# EAGLE board Charger Board (EAGLE 6.2)
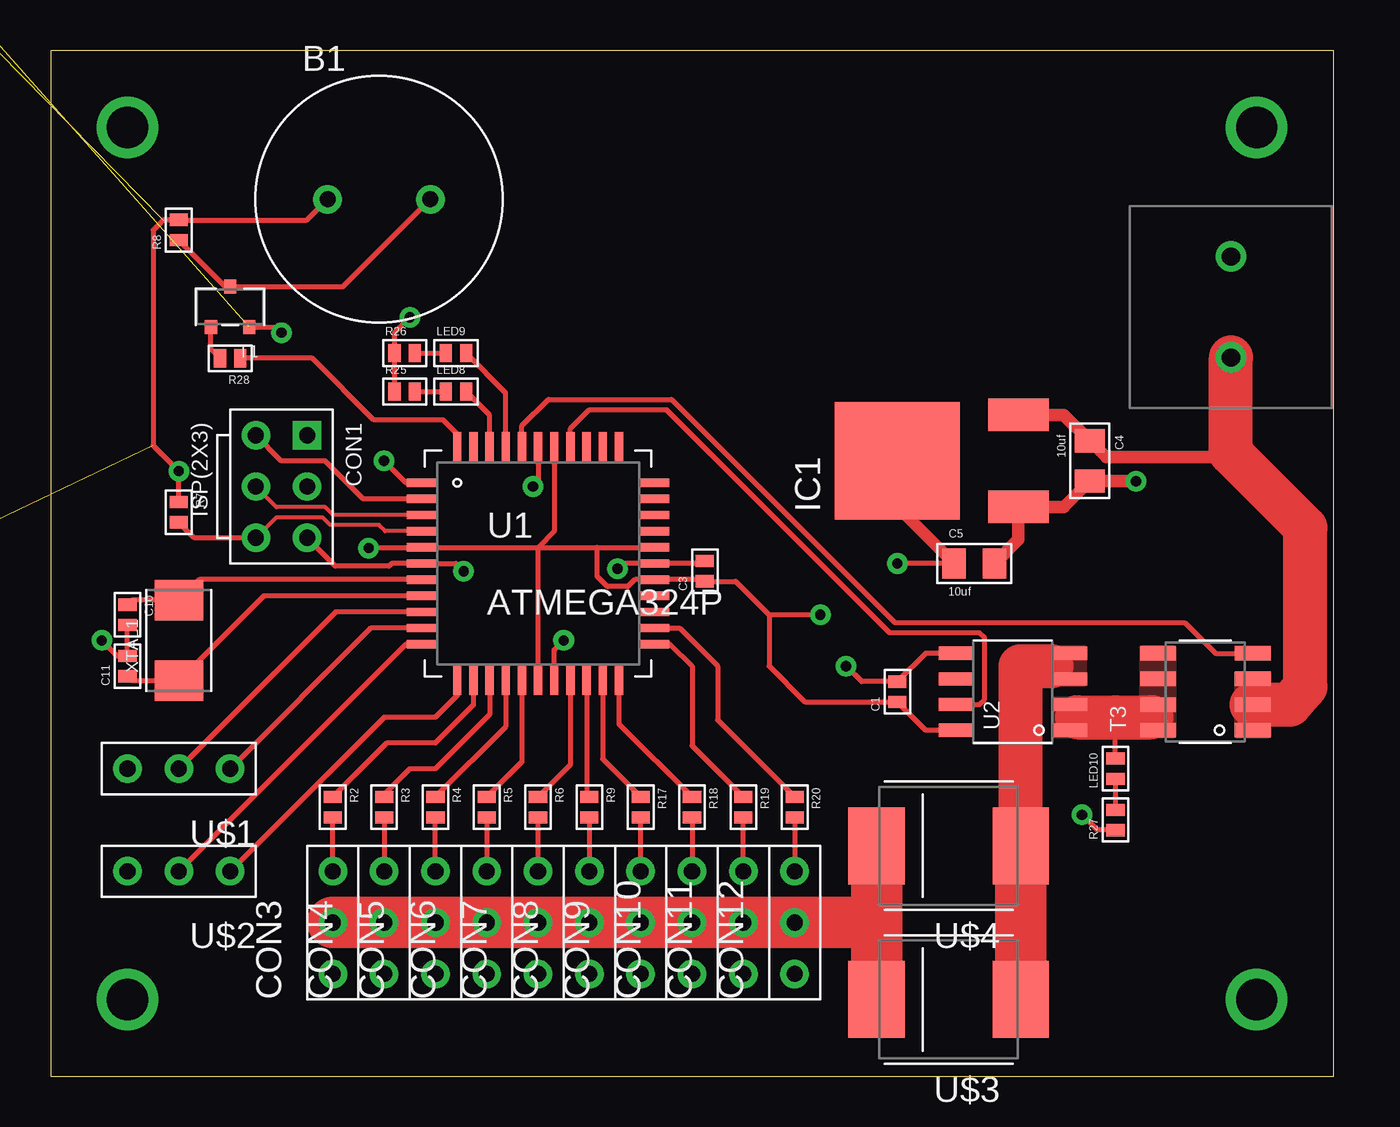
[diagram p0: board, top side]
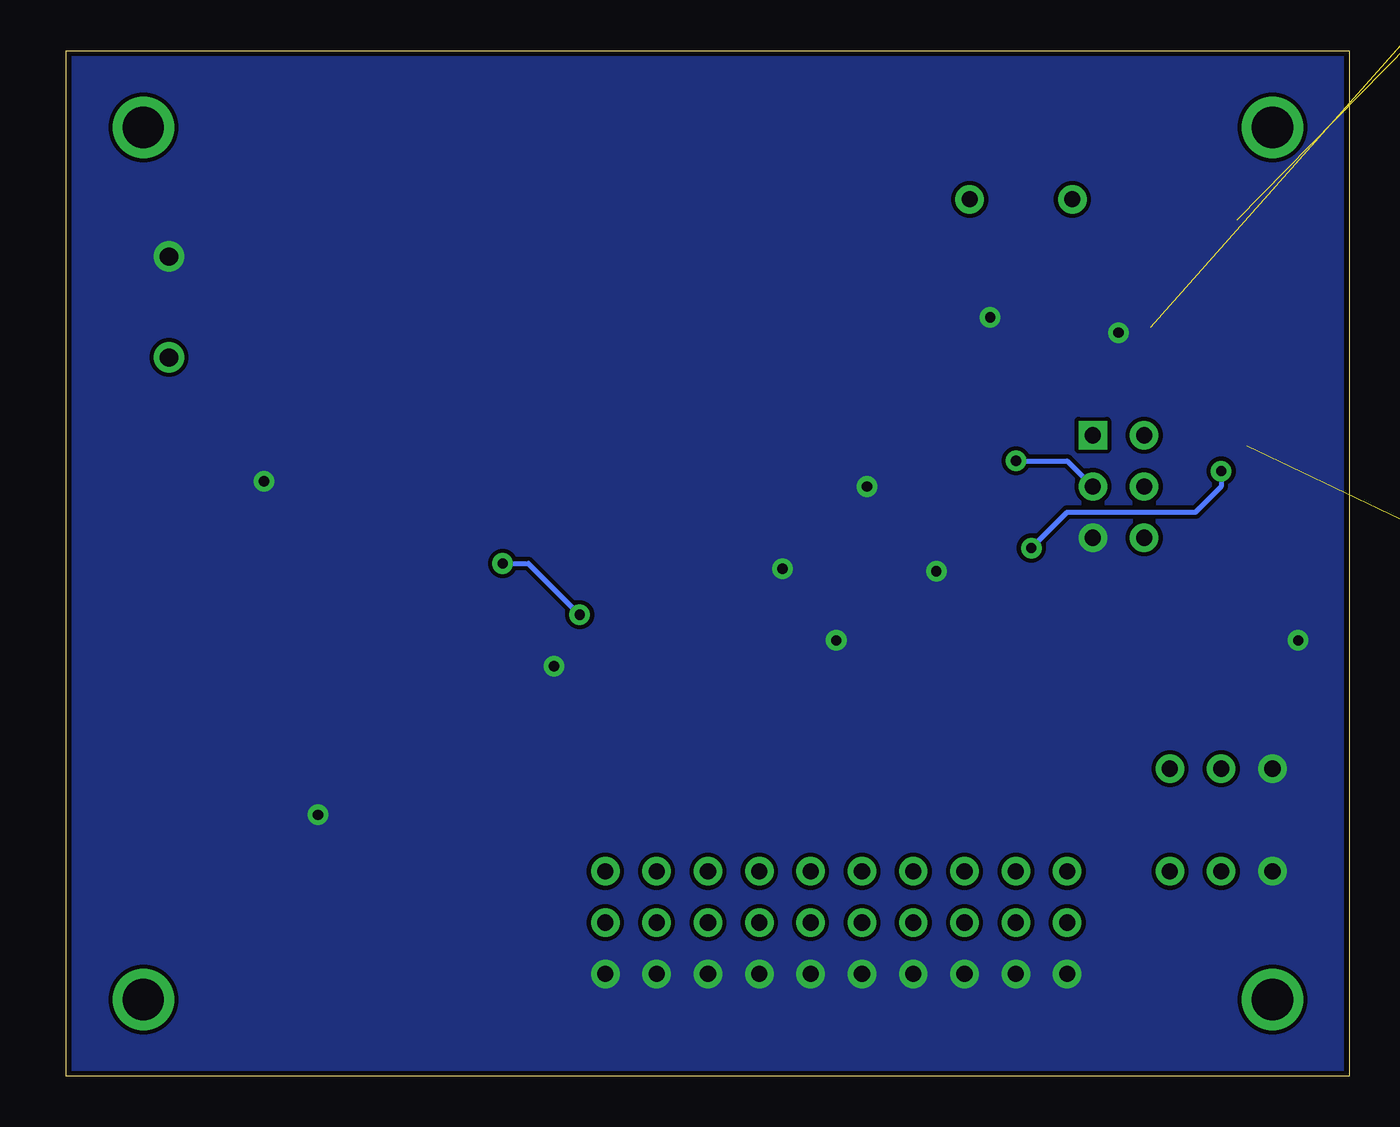
[diagram p1: board, bottom side, seen from below]

Size 63.5 x 50.8 mm. Coordinates in mm from the lower left corner, seen from the top.
Outline: 0,0 63.5,0 63.5,50.8 0,50.8 0,0
Copper layers (1*16): Top 0.035mm / dielectric 1.5mm / Bottom 0.035mm
Design rules: minimum track width 8mil, minimum drill 20mil, track to track 8mil, track to pad 8mil, pad to pad 8mil, via to via 8mil, smd to smd 8mil, copper to edge 10mil, drill to drill 8mil, minimum pad ring 12mil, minimum via ring 10mil, stop-mask expansion 4mil, vias tented up to drill 25mil, thermal gap 10mil

## Footprints (pad centres in the part's own frame; a part is rotated, then mirrored left to right if it is on the bottom)
PIEZOBUZZER = drill 0.8: 1 -2.54,0; 2 2.54,0
0603 = smd 0.6 x 0.9: 1 -0.5,0; 2 0.5,0
0805 = smd 1.15 x 1.5: 1 -1,0; 2 1,0
PINHEADER(2X3) = drill 0.8 square: 1 -2.54,1.27 | drill 0.8: 2 0,1.27; 3 2.54,1.27; 4 2.54,-1.27; 5 0,-1.27; 6 -2.54,-1.27
SCREWTERMINAL_1X2 = drill 0.9: 1 -2.5,0; 2 2.5,0
3PINHEADER_.100" = drill 0.8: 1 -2.54,0; 2 0,0; 3 2.54,0
MOUNTINGHOLE = drill 2.032 pad 2.286: P$2 0,0
DPAK = smd 1.6 x 3: 1 -2.28,-5.99; 3 2.28,-5.99 | smd 5.8 x 6.2: 2 0,0
5MM_LED_RA = drill 0.8 square: 1 -1.27,0 | drill 0.8: 2 1.27,0
SOT23 = smd 0.6 x 0.7: 1 0.95,1; 2 -0.95,1; 3 0,-1
S0-8 = smd 0.72 x 1.78: 1 -1.905,-2.34; 2 -0.635,-2.34; 3 0.635,-2.34; 4 1.905,-2.34; 5 1.905,2.34; 6 0.635,2.34; 7 -0.635,2.34; 8 -1.905,2.34
TQFP44 = smd 1.5 x 0.406: 1 -5.75,4; 2 -5.75,3.2; 3 -5.75,2.4; 4 -5.75,1.6; 5 -5.75,0.8; 6 -5.75,0; 7 -5.75,-0.8; 8 -5.75,-1.6; 9 -5.75,-2.4; 10 -5.75,-3.2; 11 -5.75,-4; 23 5.75,-4; 24 5.75,-3.2; 25 5.75,-2.4; 26 5.75,-1.6; 27 5.75,-0.8; 28 5.75,0; 29 5.75,0.8; 30 5.75,1.6; 31 5.75,2.4; 32 5.75,3.2; 33 5.75,4 | smd 0.406 x 1.5: 12 -4,-5.75; 13 -3.2,-5.75; 14 -2.4,-5.75; 15 -1.6,-5.75; 16 -0.8,-5.75; 17 0,-5.75; 18 0.8,-5.75; 19 1.6,-5.75; 20 2.4,-5.75; 21 3.2,-5.75; 22 4,-5.75; 34 4,5.75; 35 3.2,5.75; 36 2.4,5.75; 37 1.6,5.75; 38 0.8,5.75; 39 0,5.75; 40 -0.8,5.75; 41 -1.6,5.75; 42 -2.4,5.75; 43 -3.2,5.75; 44 -4,5.75
8SOIC = smd 0.65 x 1.75: 1 -1.905,-2.8; 2 -0.635,-2.8; 3 0.635,-2.8; 4 1.905,-2.8; 5 1.905,2.8; 6 0.635,2.8; 7 -0.635,2.8; 8 -1.905,2.8
SMD_DIODE = smd 2.794 x 3.81: 1 -3.568,0; 2 3.568,0
SMDXTAL = smd 2 x 2.4: 1 -2,0; 2 2,0

## Placement (x,y rotation side)
B1  PIEZOBUZZER  [PIEZOBUZZER]  16.26,43.43 0 top
C1  .1uf  [0603]  41.91,19.05 90 top
C3  1uf  [0603]  32.38,25.02 90 top
C4  10uf  [0805]  51.44,30.48 270 top
C5  10uf  [0805]  45.72,25.4 0 top
C6  10uf  [0805]  -19.05,68.58 0 top  (outside the outline)
C10  12pf  [0603]  3.81,22.86 270 top
C11  12pf  [0603]  3.81,20.32 90 top
CON1  ISP(2X3)  [PINHEADER(2X3)]  11.43,29.21 270 top
CON2  SCREWTERMINAL_1X2  [SCREWTERMINAL_1X2]  58.42,38.1 90 top
CON3  HEADER_3X1  [3PINHEADER_.100"]  13.97,7.62 90 top
CON4  HEADER_3X1  [3PINHEADER_.100"]  16.51,7.62 90 top
CON5  HEADER_3X1  [3PINHEADER_.100"]  19.05,7.62 90 top
CON6  HEADER_3X1  [3PINHEADER_.100"]  21.59,7.62 90 top
CON7  HEADER_3X1  [3PINHEADER_.100"]  24.13,7.62 90 top
CON8  HEADER_3X1  [3PINHEADER_.100"]  26.67,7.62 90 top
CON9  HEADER_3X1  [3PINHEADER_.100"]  29.21,7.62 90 top
CON10  HEADER_3X1  [3PINHEADER_.100"]  31.75,7.62 90 top
CON11  HEADER_3X1  [3PINHEADER_.100"]  34.29,7.62 90 top
CON12  HEADER_3X1  [3PINHEADER_.100"]  36.83,7.62 90 top
H1  MOUNTINGHOLE  [MOUNTINGHOLE]  3.81,3.81 0 top
H2  MOUNTINGHOLE  [MOUNTINGHOLE]  3.81,46.99 0 top
H3  MOUNTINGHOLE  [MOUNTINGHOLE]  59.69,46.99 0 top
H4  MOUNTINGHOLE  [MOUNTINGHOLE]  59.69,3.81 0 top
IC1  NCP1117DT33G  [DPAK]  41.91,30.48 90 top
LED2  IR  [5MM_LED_RA]  -62.23,2.54 0 top  (outside the outline)
LED3  IR  [5MM_LED_RA]  -68.58,2.54 0 top  (outside the outline)
LED4  IR  [5MM_LED_RA]  -16.51,20.32 0 top  (outside the outline)
LED5  IR  [5MM_LED_RA]  -22.86,20.32 0 top  (outside the outline)
LED6  IR  [5MM_LED_RA]  -29.21,20.32 0 top  (outside the outline)
LED7  IR  [5MM_LED_RA]  -35.56,20.32 0 top  (outside the outline)
LED8  [0603]  20.07,33.91 0 top
LED9  [0603]  20.07,35.81 0 top
LED10  [0603]  52.7,15.24 90 top
R2  100  [0603]  13.97,13.34 270 top
R3  100  [0603]  16.51,13.34 270 top
R4  100  [0603]  19.05,13.34 270 top
R5  100  [0603]  21.59,13.34 270 top
R6  100  [0603]  24.13,13.34 270 top
R7  10k  [0603]  6.35,27.94 270 top
R8  1k  [0603]  6.35,41.91 90 top
R9  100  [0603]  26.67,13.34 270 top
R10  [0603]  -48.26,72.39 0 top  (outside the outline)
R11  [0603]  -52.07,72.39 0 top  (outside the outline)
R12  [0603]  -55.88,72.39 0 top  (outside the outline)
R13  [0603]  -59.69,72.39 0 top  (outside the outline)
R14  [0603]  -63.5,72.39 0 top  (outside the outline)
R15  [0603]  -67.31,72.39 0 top  (outside the outline)
R16  500  [0603]  -68.58,68.58 0 top  (outside the outline)
R17  100  [0603]  29.21,13.34 270 top
R18  100  [0603]  31.75,13.34 270 top
R19  100  [0603]  34.29,13.34 270 top
R20  100  [0603]  36.83,13.34 270 top
R25  200  [0603]  17.53,33.91 0 top
R26  200  [0603]  17.53,35.81 0 top
R27  470  [0603]  52.7,12.7 90 top
R28  [0603]  8.89,35.56 180 top
T1  NPN2N2222  [SOT23]  8.89,38.1 180 top
T2  NPN2N2222  [SOT23]  -69.85,60.96 0 top  (outside the outline)
T3  SI4421DY  [S0-8]  57.15,19.05 90 top
U1  ATMEGA324P  [TQFP44]  24.13,25.4 0 top
U2  ACS711  [8SOIC]  47.62,19.05 90 top
U$1  FTDI_3PIN  [3PINHEADER_.100"]  6.35,15.24 180 top
U$2  FTDI_3PIN  [3PINHEADER_.100"]  6.35,10.16 180 top
U$3  MBRS410LT3  [SMD_DIODE]  44.45,3.81 180 top
U$4  MBRS410LT3  [SMD_DIODE]  44.45,11.43 180 top
XTAL1  10Mhz  [SMDXTAL]  6.35,21.59 90 top

## Library data of the parts
B1 C1 C3-C6 C10 C11 LED2-LED10 R2-R20 R25-R28 T1-T3 U$3 U$4 XTAL1 = Passive
CON1-CON12 H1-H4 U$1 U$2 = Mechanical
IC1 U2 = PowerIC
U1 = DigitalIC

## Nets
+3V3: B1.1 C1.1 C3.1 C5.1 C6.1 IC1.2 LED2.1 LED3.1 LED4.1 LED5.1 LED6.1 LED7.1 R7.1 R8.2 U1.5 U1.17 U1.27 U1.29 U1.38 U2.8
+5V: C4.1 CON2.1 IC1.3 T3.1 T3.2 T3.3
BUZZER: R28.1 U1.44
CHARGE+: CON3.2 CON4.2 CON5.2 CON6.2 CON7.2 CON8.2 CON9.2 CON10.2 CON11.2 CON12.2 U$3.2 U$4.2
CHARGER: T3.4 U1.40
CURRENTSENSE: U1.37 U2.7
GND: C1.2 C3.2 C4.2 C5.2 C6.2 C10.2 C11.2 CON1.3 CON2.2 CON3.1 CON4.1 CON5.1 CON6.1 CON7.1 CON8.1 CON9.1 CON10.1 CON11.1 CON12.1 IC1.1 R25.1 R26.1 R27.1 T1.2 T2.2 U1.6 U1.18 U1.28 U1.39 U2.5 U$1.3 U$2.3
LED1: LED9.2 U1.41
LED2: LED8.2 U1.42
N$1: LED10.2 T3.5 T3.6 T3.7 T3.8 U2.1 U2.2
N$2: CON1.2 U1.1
N$3: CON1.6 U1.2
N$4: U1.11 U$2.2
N$5: CON1.5 U1.3
N$6: CON1.4 R7.2 U1.4
N$7: U1.10 U$1.1
N$8: U1.9 U$1.2
N$9: B1.2 R8.1 T1.3
N$10: R10.1 R11.1 R12.1 R13.1 R14.1 R15.1 T2.3
N$11: R16.2 T2.1
N$12: C10.1 U1.7 XTAL1.2
N$13: LED2.2 R10.2
N$14: LED3.2 R11.2
N$15: LED4.2 R12.2
N$16: LED5.2 R13.2
N$17: LED6.2 R14.2
N$18: LED7.2 R15.2
N$19: U1.12 U$2.1
N$20: LED8.1 R25.2
N$21: LED9.1 R26.2
N$22: LED10.1 R27.2
N$23: U2.3 U2.4 U$3.1 U$4.1
N$24: CON3.3 R2.2
N$25: C11.1 U1.8 XTAL1.1
N$26: R28.2 T1.1
N$27: CON4.3 R3.2
N$28: CON5.3 R4.2
N$29: CON6.3 R5.2
N$30: CON7.3 R6.2
N$31: CON8.3 R9.2
N$32: CON9.3 R17.2
N$33: CON10.3 R18.2
N$34: CON11.3 R19.2
N$35: CON12.3 R20.2
SECTION1: R2.1 U1.13
SECTION2: R3.1 U1.14
SECTION3: R4.1 U1.15
SECTION4: R5.1 U1.16
SECTION5: R6.1 U1.19
SECTION6: R9.1 U1.20
SECTION7: R17.1 U1.21
SECTION8: R18.1 U1.22
SECTION9: R19.1 U1.23
SECTION10: R20.1 U1.24
TRANSMITLEDS: R16.1

## Tracks (layer width: path | path; a pad name or v marks a point on that pad's centre or on a via)
+3V3  (via drill 0.51)  (7 unrouted)
  Top 0.254: 24.13,26.2 U1.5 18.34,26.16 v15.75,26.16 | 24.13,26.2 27.05,26.2 | 27.05,26.2 U1.29 | U2.8 43.31,17.14 C1.1 37.33,18.55 35.56,20.32 35.56,22.86 | U1.17 24.13,26.2 | U1.38 24.93,27 24.13,26.2 | 27.05,26.2 27.05,24.77 27.56,24.26 28.57,24.26 28.92,24.6 U1.27 32.3,24.6 C3.1 33.9,24.52 35.56,22.86 | R7.1 v6.35,29.97 5.08,31.24 5.08,41.91 5.58,42.41 R8.2 12.69,42.41 B1.1 | C5.1 v41.91,25.4 | v38.1,22.86 35.56,22.86
  Top 0.61: C5.1 41.91,28.21 IC1.2
  Bottom 0.254: v15.75,26.16 13.97,27.94 7.62,27.94 6.35,29.21 v6.35,29.97 | v41.91,25.4 40.64,25.4 v38.1,22.86
+5V
  Top 0.254: T3.3 59.49,18.47 59.44,18.41
  Top 0.61: IC1.3 50.16,32.76 C4.1 52.24,30.67 58.61,30.67
  Top 2.184: 59.44,18.41 61.34,18.41 62.1,19.3 62.1,27.18 58.61,30.67 58.42,30.86 CON2.1
  pour Top (no thermals): 60.33,19.94 58.67,19.94 58.67,16.89 60.33,16.89
BUZZER
  Top 0.254: U1.44 20.13,31.81 19.43,32.51 16,32.51 12.95,35.56 R28.1
CHARGE+
  Top 2.54: CON3.2 CON4.2 CON5.2 CON6.2 CON7.2 CON8.2 CON9.2 CON10.2 CON11.2 CON12.2 40.88,7.62 | 40.88,7.62 U$4.2 | U$3.2 40.88,7.62
CHARGER
  Top 0.254: U1.40 23.33,32.22 24.64,33.53 30.73,33.53 41.78,22.48 56.13,22.48 57.66,20.95 T3.4
CURRENTSENSE
  Top 0.254: U2.7 45.97,18.41 46.23,18.67 46.23,21.72 45.97,21.97 41.53,21.97 30.48,33.02 26.67,33.02 25.73,32.08 U1.37
GND  (via drill 0.51)  (2 unrouted)
  Top 0.254: C10.2 C11.2 3.31,20.82 v2.54,21.59 | R27.1 51.81,12.2 v51.05,12.95 | R25.1 R26.1 17.03,36.84 v17.78,37.59 | CON1.3 14.1,25.27 16.76,25.27 16.89,25.4 U1.6 20.07,25.4 v20.45,25.02 | U2.5 43.31,20.95 C1.2 40.14,19.55 v39.37,20.32 | C3.2 32.25,25.4 U1.28 28.32,25.4 v28.07,25.15 | U1.18 24.93,21.12 v25.4,21.59 | U1.39 24.13,29.46 v23.88,29.21 | T1.2 11.16,37.1 v11.43,36.83
  Top 0.61: C5.2 47.9,26.58 IC1.1 50.16,28.2 C4.2 53.7,29.48 v53.72,29.46
  pour Bottom (no thermals): 0,50.8 76.2,50.8 76.2,0 0,0
LED1
  Top 0.254: U1.41 22.53,33.85 LED9.2
LED2
  Top 0.254: U1.42 21.73,32.74 LED8.2
N$1
  Top 0.254: U2.1 50.8,17.78 | LED10.2 52.7,17.78
  Top 2.184: 50.8,17.78 52.7,17.78 54.48,17.78
  pour Top (no thermals): 51.18,18.67 49.66,18.67 49.66,16.89 51.18,16.89
  pour Top (no thermals): 55.63,21.21 53.98,21.21 53.98,16.89 55.63,16.89
N$2  (via drill 0.51)
  Top 0.254: U1.1 17.59,29.4 v16.51,30.48
  Bottom 0.254: v16.51,30.48 13.97,30.48 CON1.2
N$3
  Top 0.254: U1.2 15.47,28.6 13.59,30.48 11.43,30.48 CON1.6
N$4
  Top 0.254: U1.11 17.59,21.4 U$2.2
N$5
  Top 0.203: U1.3 13.98,27.8 13.59,28.19 11.18,28.19 CON1.5
N$6
  Top 0.203: CON1.4 11.18,27.69 13.46,27.69 13.77,27.38 13.84,27.3 16.26,27.3 16.56,27 U1.4
  Top 0.254: CON1.4 7.12,26.67 R7.2
N$7
  Top 0.254: U1.10 15.85,22.2 U$1.1
N$8
  Top 0.254: U1.9 14.11,23 U$1.2
N$9
  Top 0.254: R8.1 8.66,39.1 T1.3 14.46,39.1 B1.2
N$10  (6 unrouted)
N$11  (1 unrouted)
N$12
  Top 0.254: C10.1 4.04,23.59 XTAL1.2 7.36,24.6 U1.7
N$13  (1 unrouted)
N$14  (1 unrouted)
N$15  (1 unrouted)
N$16  (1 unrouted)
N$17  (1 unrouted)
N$18  (1 unrouted)
N$19
  Top 0.254: U1.12 20.13,18.86 19.05,17.78 16.51,17.78 U$2.1
N$20
  Top 0.254: R25.2 LED8.1
N$21
  Top 0.254: R26.2 LED9.1
N$22
  Top 0.254: LED10.1 R27.2
N$23
  Top 0.254: 49.53,20.32 U2.4
  Top 2.184: U$4.1 48.01,20.32 49.53,20.32
  Top 2.54: U$3.1 U$4.1
  pour Top (no thermals): 51.18,21.21 49.66,21.21 49.66,19.43 51.18,19.43
N$24
  Top 0.254: CON3.3 R2.2
N$25
  Top 0.254: C11.1 4.04,19.59 XTAL1.1 10.56,23.8 U1.8
N$26
  Top 0.254: R28.2 7.94,36.01 T1.1
N$27
  Top 0.254: R3.2 CON4.3
N$28
  Top 0.254: CON5.3 R4.2
N$29
  Top 0.254: R5.2 CON6.3
N$30
  Top 0.254: CON7.3 R6.2
N$31
  Top 0.254: R9.2 CON8.3
N$32
  Top 0.254: CON9.3 R17.2
N$33
  Top 0.254: R18.2 CON10.3
N$34
  Top 0.254: CON11.3 R19.2
N$35
  Top 0.254: R20.2 CON12.3
SECTION1
  Top 0.254: U1.13 20.93,18.39 19.05,16.51 16.64,16.51 R2.1
SECTION2
  Top 0.254: U1.14 21.73,17.92 19.05,15.24 17.78,15.24 16.51,13.97 R3.1
SECTION3
  Top 0.254: U1.15 22.53,17.32 R4.1
SECTION4
  Top 0.254: U1.16 23.33,15.57 R5.1
SECTION5
  Top 0.254: U1.19 25.73,15.44 R6.1
SECTION6
  Top 0.254: U1.20 26.53,13.97 R9.1
SECTION7
  Top 0.254: U1.21 27.33,15.71 R17.1
SECTION8
  Top 0.254: U1.22 28.13,17.45 R18.1
SECTION9
  Top 0.254: U1.23 30.67,21.4 31.75,20.32 31.75,16.38 R19.1
SECTION10
  Top 0.254: U1.24 31.14,22.2 33.02,20.32 33.02,17.64 R20.1